# Altium PCB RGB_attiny2313.PcbDoc
Units mm, origin at the board's own origin, x right, y up, seen from the top; angles counter-clockwise.
Board outline 46.74 x 43.05 mm, 2 copper layers (Top Layer, Bottom Layer); 7 components, 104 nets, 55 pads, 0 vias.
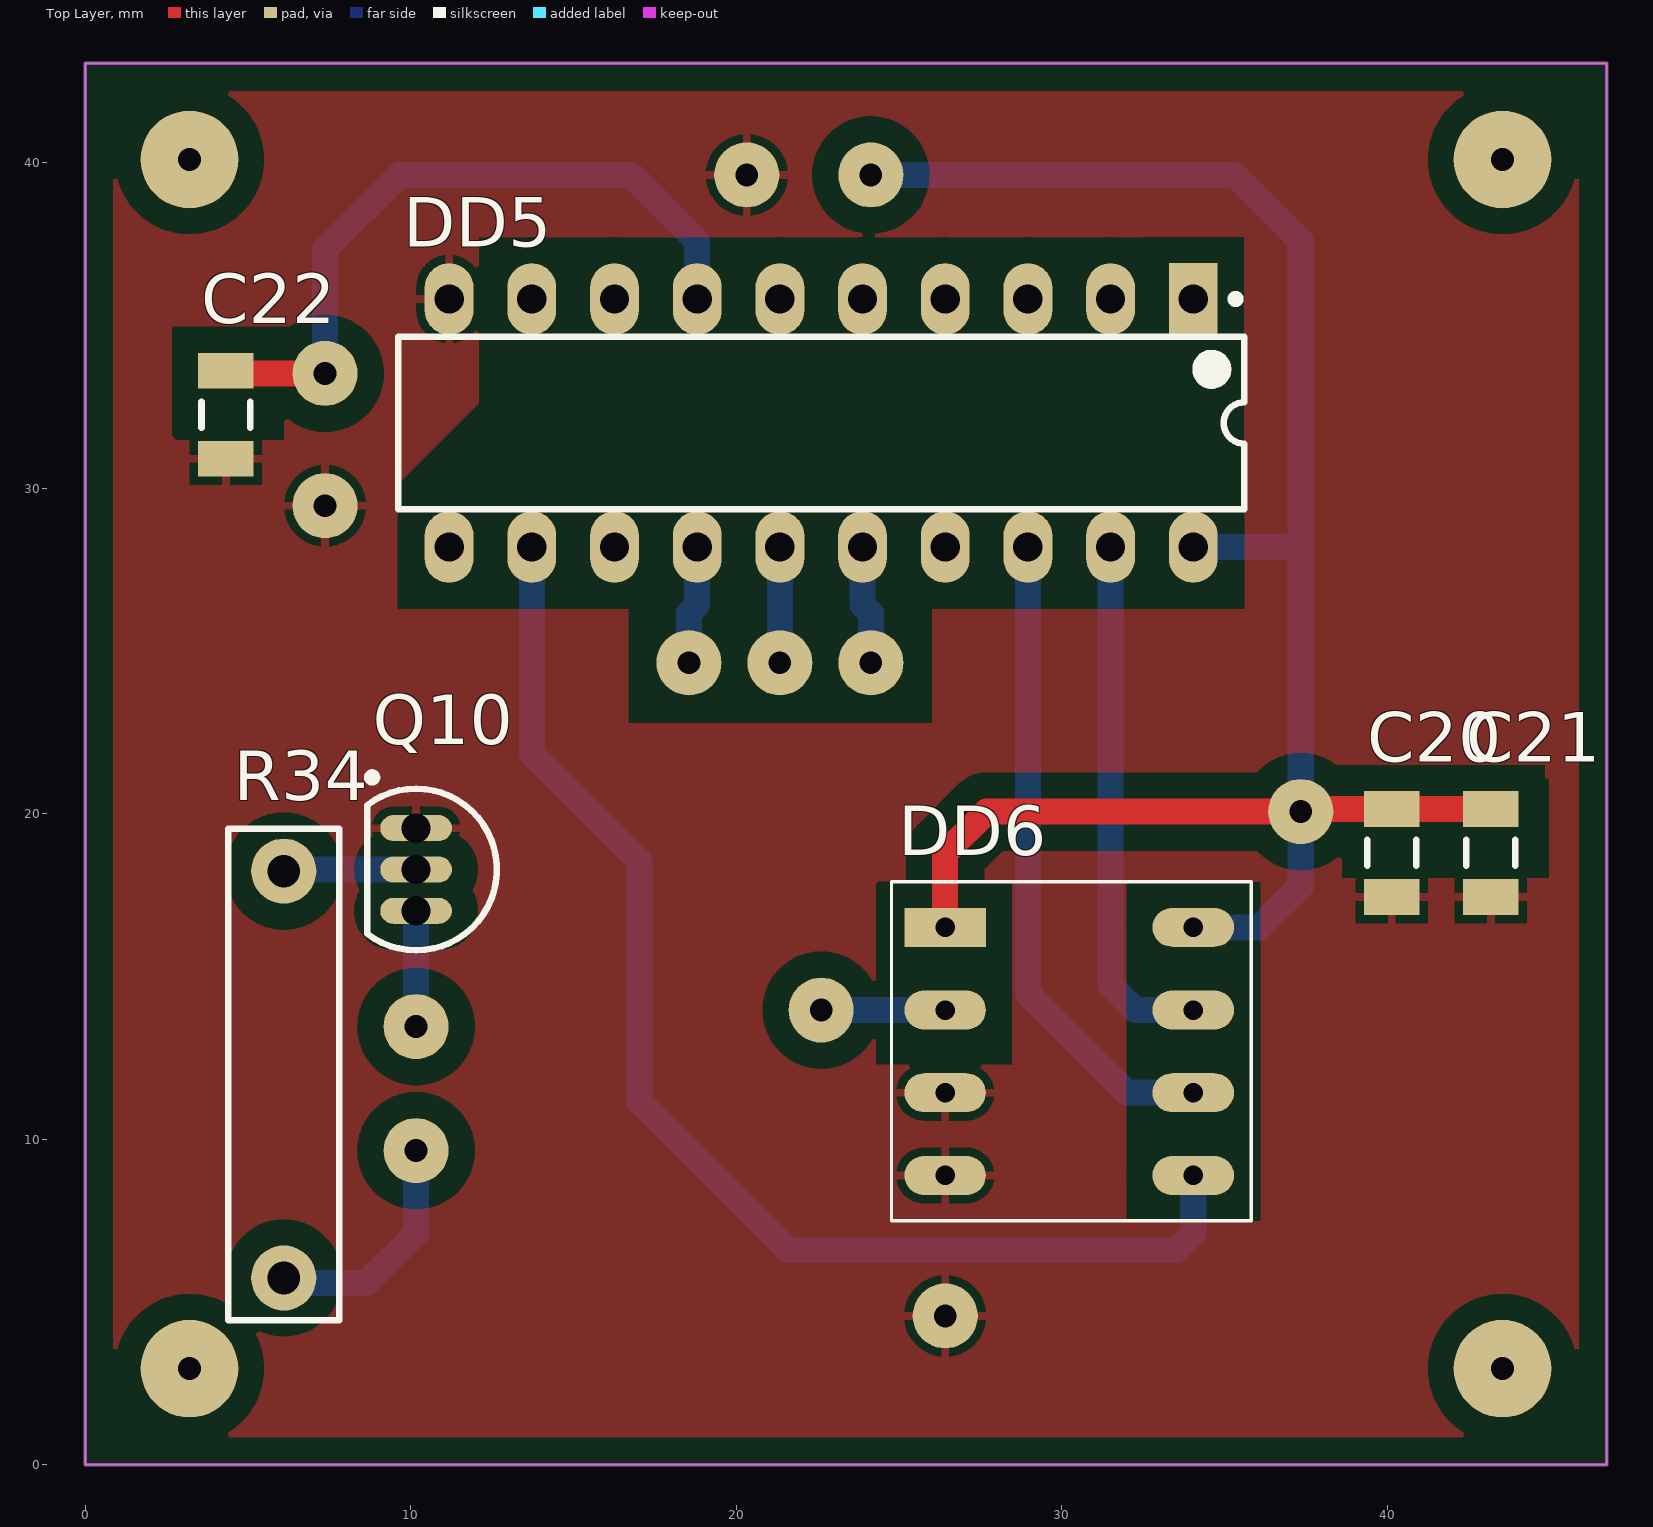
[diagram p0: Top Layer view]
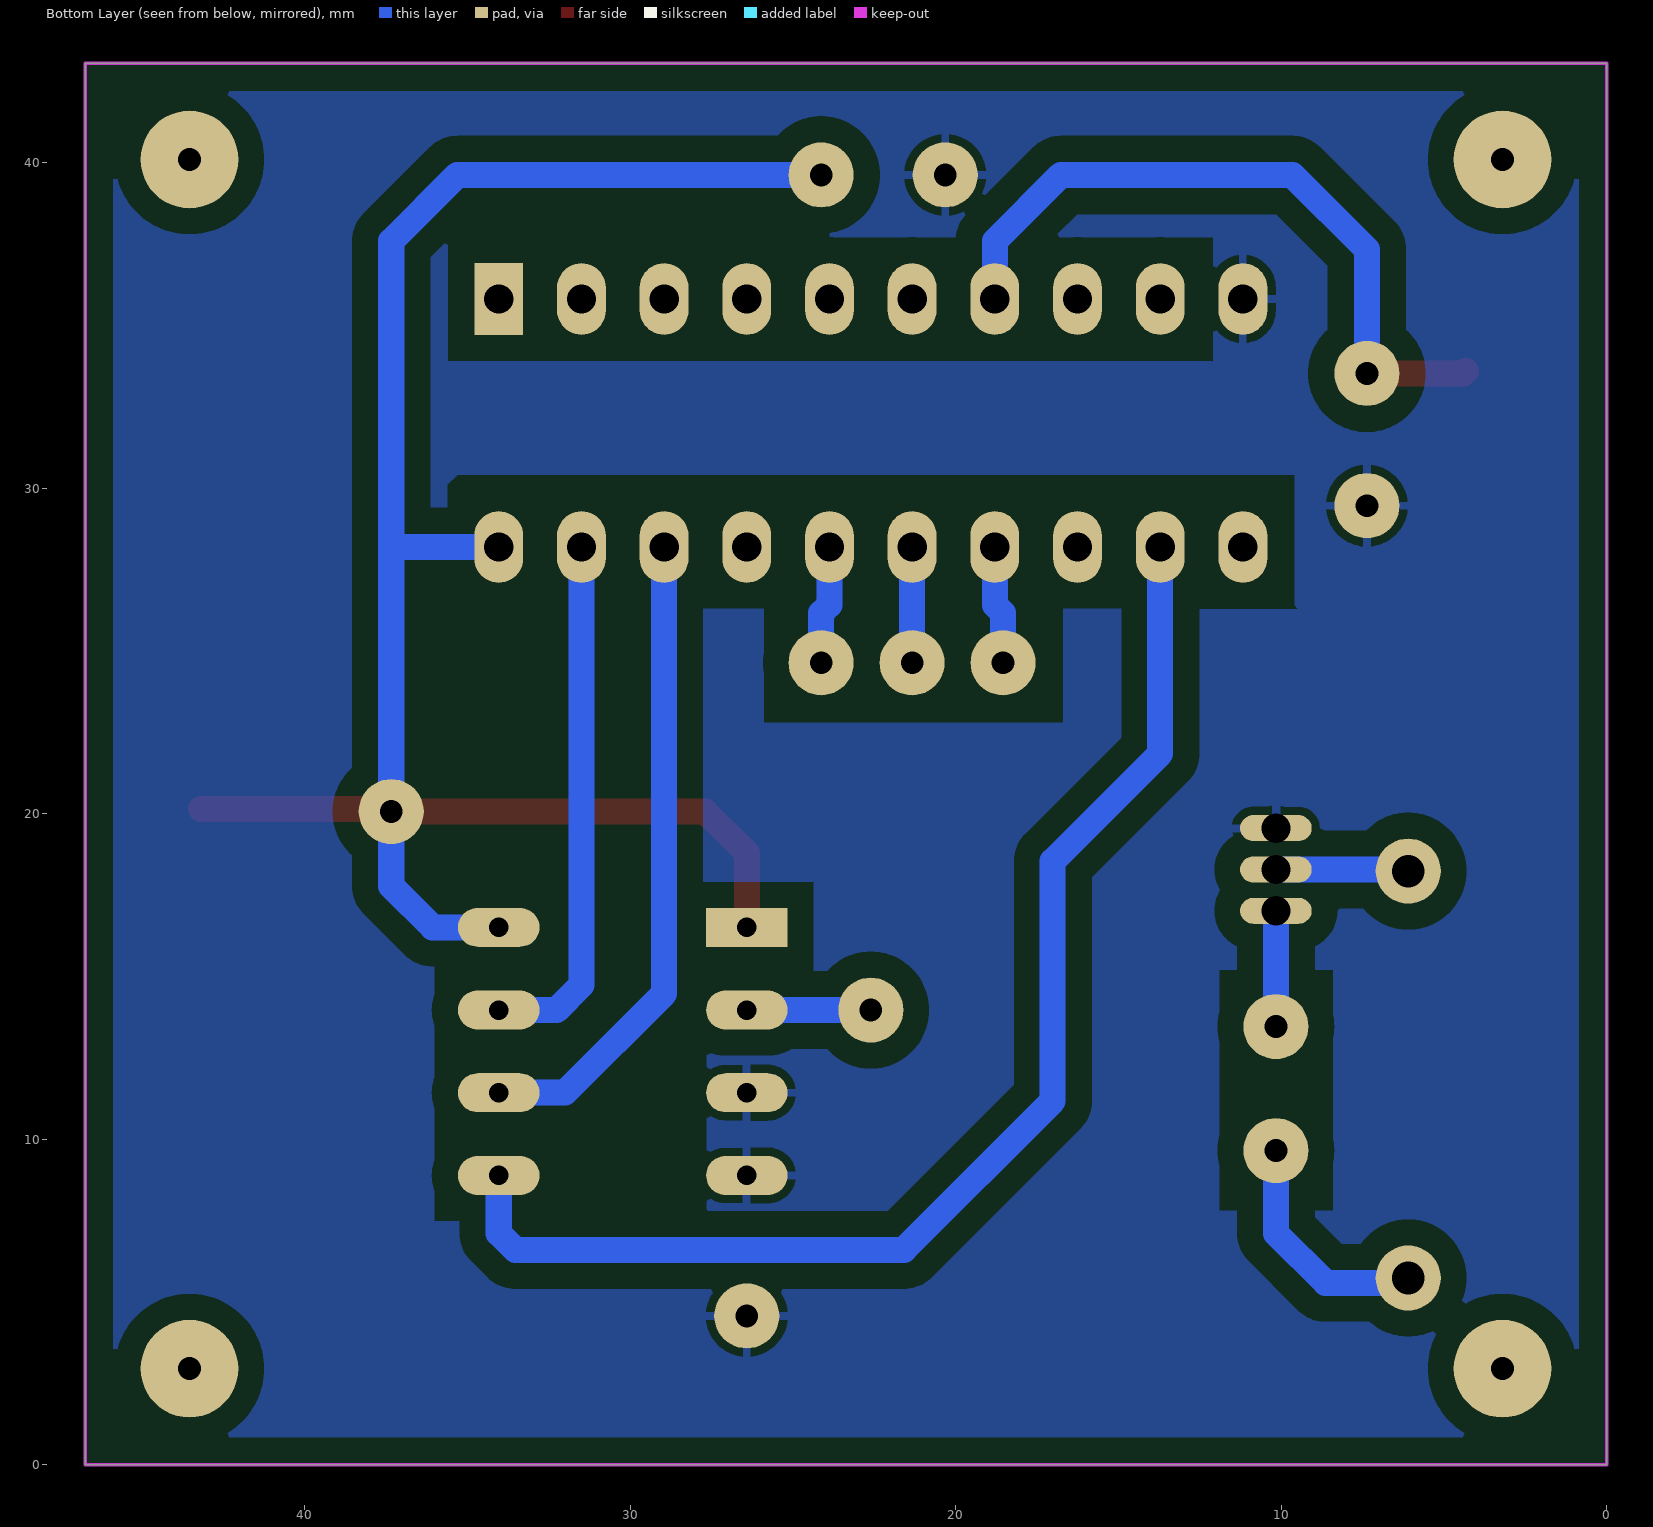
[diagram p1: Bottom Layer view, seen from below]

## Layer stack, top to bottom
Top Solder: solder mask 0.0102, Solder Resist, Dk 3.5
Top Layer: signal copper 0.0356
Dielectric 1: dielectric 0.32, FR-4, Dk 4.8
Bottom Layer: signal copper 0.0356
Bottom Solder: solder mask 0.0102, Solder Resist, Dk 3.5

## Board outline
0,0 46.736,0 46.736,43.053 0,43.053

## Design rules (kind name [scope] priority, off if disabled: settings)
Clearance [All] p1: gap=0.8 ignorepadtopadclearanceinfootprint=FALSE
PolygonConnect [All] p1: connectstyle=Relief reliefconductorwidth=0.254 reliefentries=4 polygonreliefangle="90 Angle" airgapwidth=0.254
RoutingVias [All] p1: holewidth=0.711 width=1.27 viastyle="Through Hole" minholewidth=0.711 minwidth=1.27 maxholewidth=0.711 maxwidth=1.27
SolderMaskExpansion [All] p1: expansion=0.102
Width [All] p1 off: maxlimit=0.254 minlimit=0.254 preferedwidth=0.254
30 further rules are at their usual default settings.

## Components (designator, comment, footprint, x,y, rotation, side; value= is the part's Value field where it differs from the comment)
C20 "Cap Semi" C1206 40.132,18.796 r90 top value=10uF
C21 "Cap Semi" C1206 43.18,18.796 r90 top value=1uF
C22 "Cap Semi" C1206 4.318,32.258 r90 top value=0.1uF
DD5 "ATtiny2313-20PU" 20P3 22.606,32.004 r270 top
DD6 "MCP3201" "MAX1771_DIP8 - duplicate" 26.416,16.51 r0 top
Q10 "MPSA42" TO-92A 10.16,18.288 r180 top
R34 "10k" MLT 6.096,11.938 r270 top

## Footprints (in the part's own frame and the unit in brackets; to place one, negate y for a bottom-side part, rotate by r counter-clockwise, add the part's x,y. Pads: shape width x height; smd on the part's side, far side on the other; paste and mask are expansions set on the pad)
20P3 [mm] "DIP, 20-Leads, Row Spacing 7.62mm, Pitch 2.54mm, Body 25.9x6.61mm"
  rect 2.2x1.5 hole 0.9: 1(-3.81,11.43)
  oval 2.2x1.5 hole 0.9: 2(-3.81,8.89) 3(-3.81,6.35) 4(-3.81,3.81) 5(-3.81,1.27) 6(-3.81,-1.27) 7(-3.81,-3.81) 8(-3.81,-6.35) 9(-3.81,-8.89) 10(-3.81,-11.43) 11(3.81,-11.43) 12(3.81,-8.89) 13(3.81,-6.35) 14(3.81,-3.81) 15(3.81,-1.27) 16(3.81,1.27) 17(3.81,3.81) 18(3.81,6.35) 19(3.81,8.89) 20(3.81,11.43)
  silkscreen extent -3.93,-13 2.65,13, body extent -3.6,-12.95 3.6,12.95, height 5.34
C1206 [mm] "Chip Capacitor, Body 3.2x1.6mm, IPC High Density"
  rect 1.1x1.7 smd: 1(-1.35,0) 2(1.35,0)
  silkscreen extent -0.4,-0.75 0.4,0.75, body extent -1.7,-0.9 1.7,0.9, height 1.3
"MAX1771_DIP8 - duplicate" [mm]
  rect 2.5x1.2 hole 0.6: 1(0,0)
  oval 2.5x1.2 hole 0.6: 2(0,-2.54) 3(0,-5.08) 4(0,-7.62) 5(7.62,-7.62) 6(7.62,-5.08) 7(7.62,-2.54) 8(7.62,0)
  silkscreen extent -1.65,-9.02 9.4,1.4, body extent 0.71,-8.51 6.91,0.89, height 4.36
MLT [mm]
  round 2 hole 1: 1(-6.3,0) 2(6.2,0)
  silkscreen extent -7.6,-1.7 7.5,1.7, body extent -6.55,-1.5 6.55,1.5, height 3.5
TO-92A [mm] "TO, Flat Index; 3 In-Line, Axial Leads; Body Dia. 4.5mm; Leads 0.51 x 0.48 mm (max)"
  oval 2.2x0.8 hole 0.9: 1(0,-1.27) 2(0,0) 3(0,1.27)
  silkscreen extent -2.48,-2.95 1.5,2.48, body extent -2.48,-2.5 1.5,2.5, height 6.86

## Part data
C20 C21 C22: "Capacitor (Semiconductor SIM Model)", LatestRevisionDate=29-May-2009, LatestRevisionNote="IPC-7351 Footprint Added.", PackageDescription="Chip Capacitor", PackageReference=C1206, Published=8-Jun-2000, Publisher="Altium Limited"
DD5: "Low Power tinyAVR® 8-Bit Microcontroller, 2K Flash Memory, 20MHz, Industrial Temperature, 20-Lead PDIP, Pb-Free", Supplier Part Number 1=ATTINY2313-20PU-ND, Code_JEDEC=MS-001-AD, ComponentLink1Description="Manufacturer Link", ComponentLink1URL=http://www.atmel.com/products/AVR/tinyavr.asp?, ComponentLink2Description=Datasheet, ComponentLink2URL=http://www.atmel.com/dyn/resources/prod_documents/doc2543.pdf, ComponentLink3Description="Atmel.com Home", ComponentLink3URL=http://www.atmel.com, DatasheetVersion="DOC2543B, Mar-2009", PackageDescription="20-lead (0.300\"/7.62mm Wide) Plastic Dual Inline Package (PDIP)", PackageReference=20P3, PackageVersion="revC, Jan-2004", Published=20-Nov-2009, Publisher="Altium Limited", Supplier 1=Digi-Key, Supplier 2=Farnell, Supplier 3=Mouser, Supplier Part Number 2=9171592, Supplier Part Number 3=556-ATTINY2313-20PU
Q10: library part 2N3904, "NPN General Purpose Amplifier", ComponentLink1Description="Manufacturer Link", ComponentLink1URL=http://www.fairchildsemi.com/, ComponentLink2Description=Datasheet, ComponentLink2URL=http://www.fairchildsemi.com/ds/2N%2F2N3904.pdf, DatasheetVersion=1997, LatestRevisionDate=15-Jan-2003, LatestRevisionNote="PCB Footprint 'BCY-W3/D4.7' replaced", PackageDescription="TO, Flat Index; 3 In-Line, Axial Leads; Body Dia. 4.5mm; Leads 0.51 x 0.48 mm (max)", PackageReference=TO-92A, PackageVersion=Sep-1998, Published=8-Jun-2000, Publisher="Altium Limited"
R34: library part Resistor, "MLT"

## Free pads (board coordinates)
  round 2 hole 0.7: 30(24.13,39.624) 31(7.366,29.464) 31(20.32,39.624) 32(10.16,13.462) 33(10.16,9.652) 34(18.542,24.638) 35(21.336,24.638) 36(24.13,24.638) 37(7.366,33.528) 38(37.338,20.066) 39(22.606,13.97) 40(26.416,4.572)
  round 3 hole 0.7: 41(3.2,2.953) 41(3.2,40.1) 41(43.536,2.953) 41(43.536,40.1)

## Nets (pads, with @x,y where several pads share a name; then routed paths per layer and width w, separated by ;. In a path a pad name is that pad's centre, name@x,y a point inside that pad or via, vN(x,y) a via of type N, cw(c..) or ccw(c..) an arc to the next point about the centre after c; other vN are vias at no path point)
"9В AC": 
"12В AC": 
+5V: C20.2 C21.2 DD5.20 DD6.1 DD6.8 pad.30 pad.38 | length 60.9
  Top Layer w0.8: DD6.1 26.416,18.796 27.686,20.066 pad.38 pad.38@37.418,20.146 ; pad.38@37.164,20.146 pad.38@37.418,20.146 ; C21.2 C20.2 pad.38@37.418,20.146
  Bottom Layer w0.8: pad.30 35.306,39.624 37.338,37.592 37.338,28.194 ; DD6.8 36.068,16.51 37.338,17.78 pad.38 37.338,28.194 ; DD5.20 37.338,28.194
+5В: 
+12В: 
+180В: 
DHT11_PB4: 
DIG0: 
DIG1: 
DIG2: 
DIG3: 
DIG4: 
DIG5: 
DIG6: 
DIG7: 
DIG8: 
DIG9: 
GND: C20.1 C21.1 C22.1 DD5.10 DD6.3 DD6.4 pad.31 pad.40 Q10.1
IN1: 
IN2: 
IN3: 
IN4: 
L1: 
L2: 
L3: 
L4: 
L5: 
L6: 
L7: 
L8: 
L9: 
L10: 
NetC5_1: 
NetC12_1: 
NetC15_2: 
NetC16_1: 
NetD1_1: 
NetD2_1: 
NetD3_1: 
NetD3_2: 
NetDD1_1: 
NetDD1_3: 
NetDD1_8: 
NetDD2_3: 
NetDD2_4: 
NetDD2_6: 
NetDD2_7: 
NetDD4_7: 
NetDD5_12: DD5.12 DD6.5 | length 39.3
  Bottom Layer w0.8: DD5.12 13.716,21.844 17.018,18.542 17.018,11.176 21.59,6.604 33.528,6.604 34.036,7.112 DD6.5
NetDD5_18: DD5.18 DD6.6 | length 20.1
  Bottom Layer w0.8: DD5.18 28.956,14.478 32.004,11.43 DD6.6
NetDD5_19: DD5.19 DD6.7 | length 16.3
  Bottom Layer w0.8: DD5.19 31.496,14.732 32.258,13.97 DD6.7
NetDD6_2: DD6.2 pad.39 | length 3.8
  Bottom Layer w0.8: pad.39 DD6.2
NetHG1_11: 
NetHG2_11: 
NetHG3_11: 
NetHG4_11: 
NetHG5_2: 
NetQ1_2: 
NetQ2_2: 
NetQ3_2: 
NetQ4_2: 
NetQ5_2: 
NetQ5_3: 
NetQ6_2: 
NetQ6_3: 
NetQ7_2: 
NetQ7_3: 
NetQ8_2: 
NetQ8_3: 
NetQ10_2: Q10.2 R34.1 | length 4.1
  Bottom Layer w0.8: R34.1 6.146,18.288 Q10.2
NetQ10_3: pad.32 Q10.3 | length 3.6
  Bottom Layer w0.8: pad.32 Q10.3
NetR1_1: 
NetR1_2: 
NetR2_1: 
NetR2_2: 
NetR3_1: 
NetR3_2: 
NetR4_2: 
NetR5_2: 
NetR6_2: 
NetR7_2: 
NetR8_2: 
NetR9_2: 
NetR10_2: 
NetR11_2: 
NetR13_2: 
NetR34_2: pad.33 R34.2 | length 7.3
  Bottom Layer w0.8: R34.2 6.246,5.588 8.636,5.588 10.16,7.112 pad.33
OC0A: DD5.14 pad.34 | length 3.7
  Bottom Layer w0.8: pad.34 18.542,26.162 18.796,26.416 DD5.14
OC1A: DD5.15 pad.35 | length 3.6
  Bottom Layer w0.8: pad.35 DD5.15
OC1B: DD5.16 pad.36 | length 3.7
  Bottom Layer w0.8: DD5.16 23.876,26.416 24.13,26.162 pad.36
PC0: 
PC1: 
PC2: 
PC3: 
PD3: C22.2 DD5.7 pad.37 | length 21.9
  Top Layer w0.8: C22.2 4.398,33.528 pad.37
  Bottom Layer w0.8: pad.37 7.366,37.338 9.652,39.624 16.764,39.624 18.796,37.592 DD5.7
RGB1: 
RGB2: 
RGB3: 
RTC_SCL: 
RTC_SDA: 
VCC: 
XTAL1: 
XTAL2: 
ИНС-1: 
pads on no net: DD5.1 DD5.2 DD5.3 DD5.4 DD5.5 DD5.6 DD5.8 DD5.9 DD5.11 DD5.13 DD5.17

## Polygon pours and split planes (outlines as drawn)
GND on Top Layer "Top layer" (solid, remove dead copper, pour order 4): 0,43.053 46.736,43.053 46.736,0 0,0
GND on Bottom Layer "Bottom Layer" (solid, remove dead copper, pour order 6): 46.736,43.053 46.736,0 0,0 0,43.053

## Keep-outs
Keep-Out Layer:
  the board outline again, w0.1

## Other copper
Top Layer:
  pour cut-out: 24.366,17.91 24.3,17.844 24.3,12.3 28.5,12.3 28.466,12.334 28.466,17.9
  pour cut-out: 32,17.9 32,7.5 36.1,7.5 36.1,17.9
  pour cut-out: 16.7,26.3 16.7,22.8 26,22.8 26,26.3
  pour cut-out: 35.586,33.914 35.586,30.114 35.6,30.1 9.6,30.1 12.107,32.607 12.107,33.907
  pour cut-out: 34.036,26.293 35.593,26.293 35.6,26.3 35.6,30.1 9.6,30.1 9.6,26.3 35.6,26.3
  pour cut-out: 35.586,37.714 35.572,37.7 12.1,37.7 12.1,33.9 12.114,33.914 35.586,33.914
  pour cut-out: 2.668,34.958 2.668,31.622 2.794,31.496 6.096,31.496 6.096,34.783 6.27,34.957
  pour cut-out: 38.608,21.082 38.608,18.034 44.958,18.034 44.958,21.082
Bottom Layer:
  pour cut-out: 32,17.9 36.1,17.9 36,17.8 36,7.5 32,7.5
  pour cut-out: 11.9,15.2 11.9,7.8 8.4,7.8 8.4,15.2
  pour cut-out: 27.648,12.696 27.648,7.848 27.6,7.8 32.7,7.8 32.7,10.3 32.8,10.4 32.5,10.7 31.5,10.7 28.6,13.6 28.1,13.6 27.8,13.3
  pour cut-out: 25.9,26.3 25.9,22.8 16.7,22.8 16.7,26.3
  pour cut-out: 35.6,26.3 35.6,30.1 35.3,30.4 9.6,30.4 9.6,26.4 9.5,26.3
  pour cut-out: 35.6,37.7 35.586,37.686 35.586,33.914 12.114,33.914 12.1,33.9 12.1,37.7